# Altium PCB PCB2.PcbDoc
Units mil, origin at the board's own origin, x right, y up, seen from the top; angles counter-clockwise.
Board outline 3188.98 x 2086.8 mil, 2 copper layers (Top Layer, Bottom Layer); 67 components, 40 nets, 224 pads, 205 vias.
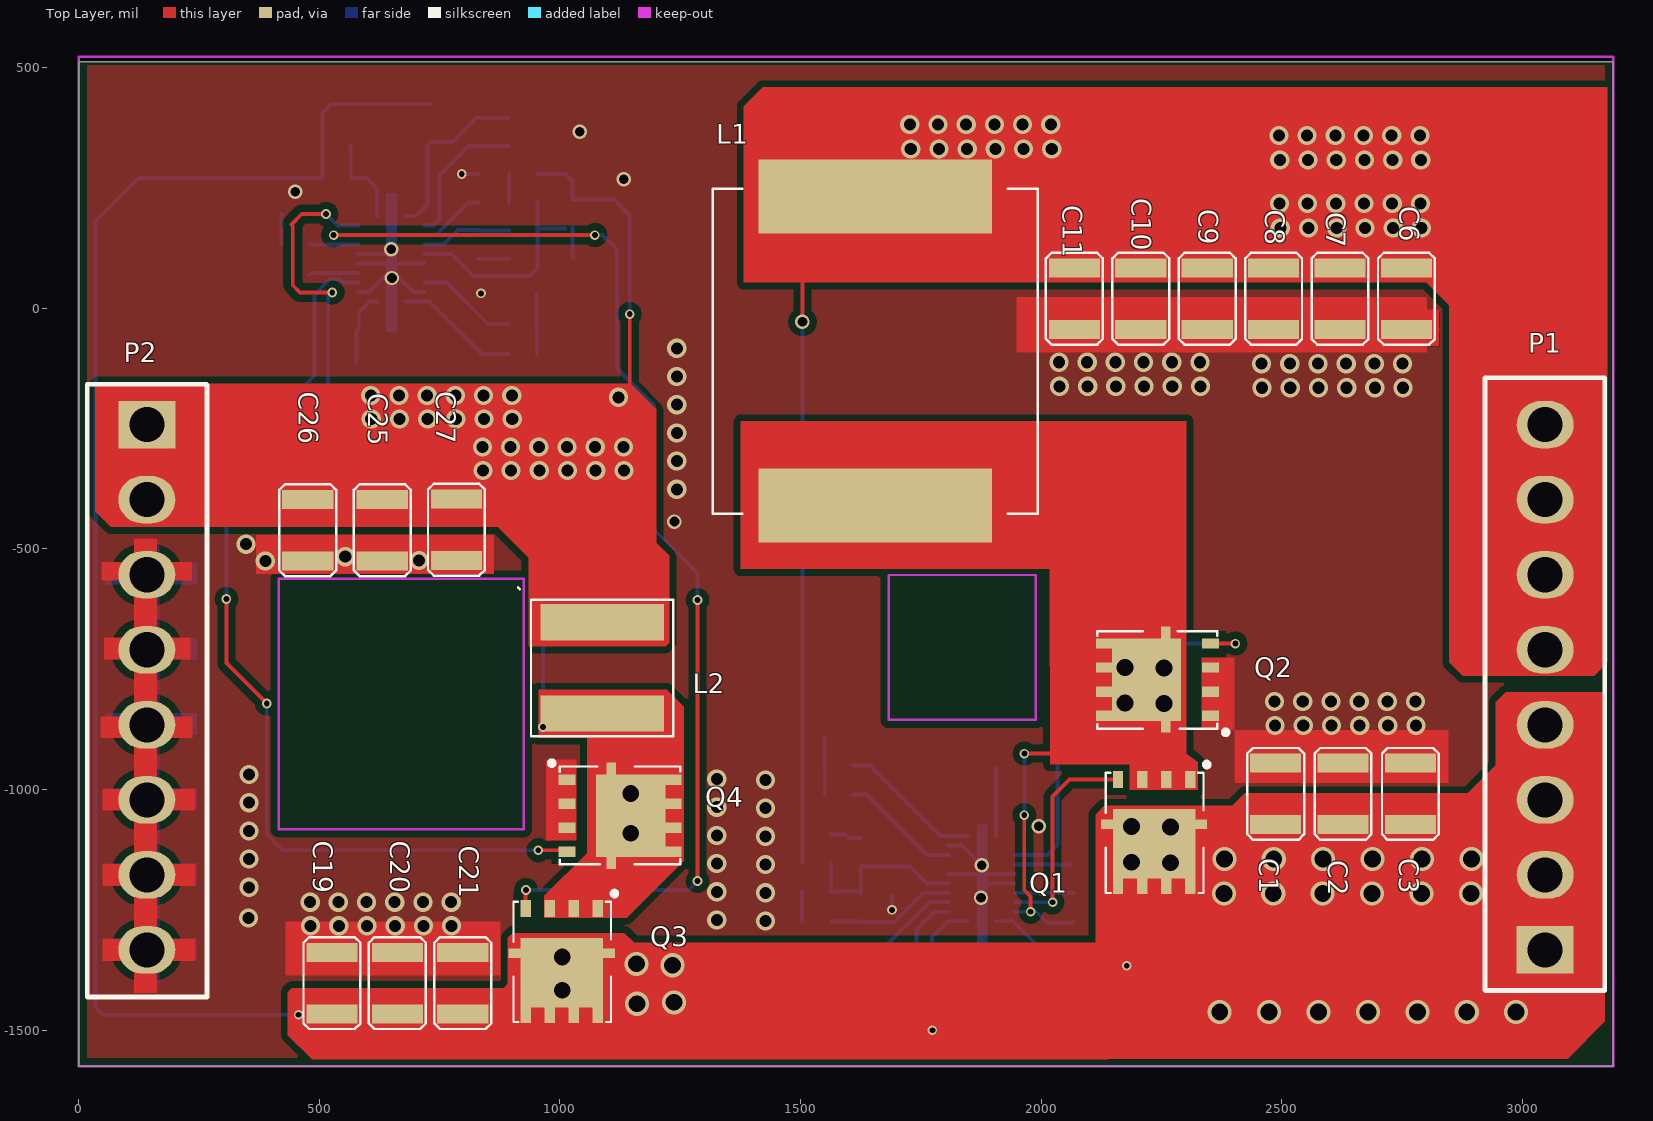
[diagram p0: Top Layer view]
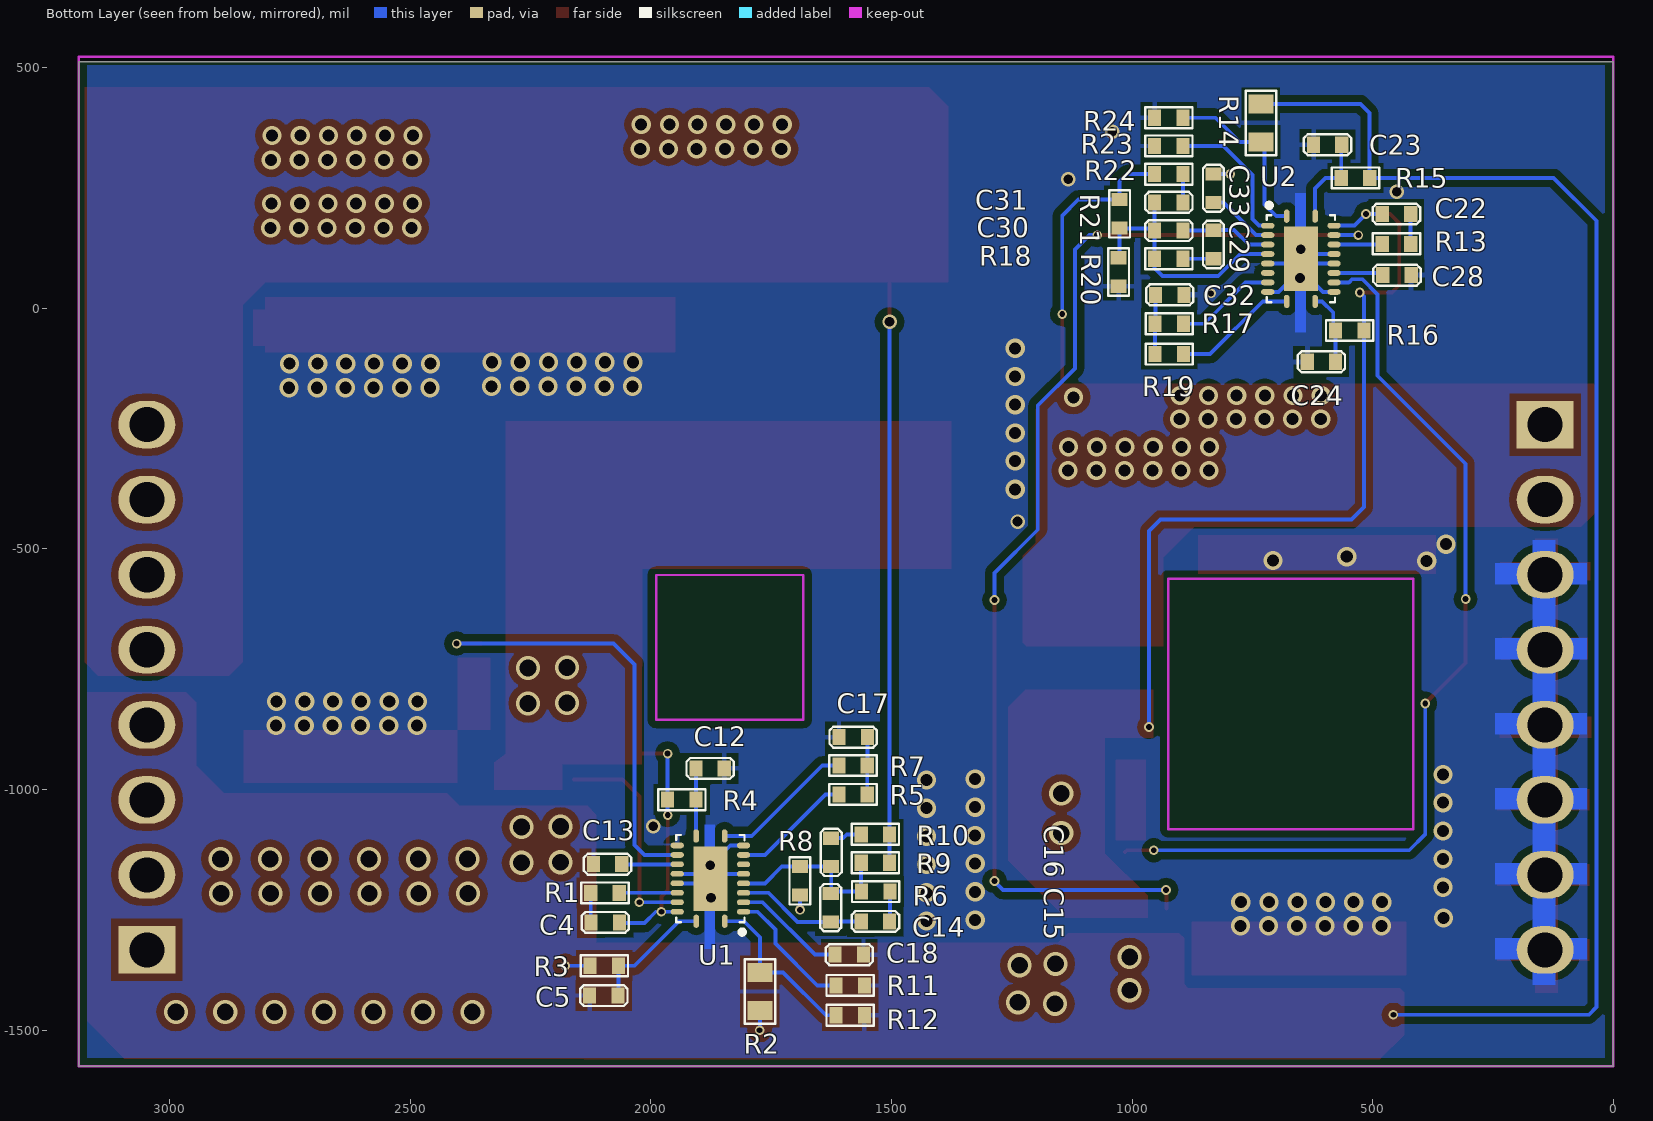
[diagram p1: Bottom Layer view, seen from below]

## Layer stack, top to bottom
Top Layer: signal copper 1.4
Dielectric: dielectric 12.6, FR-4, Dk 4.8
Bottom Layer: signal copper 1.4

## Board outline
0,-1574.8 0,512 3188.98,512 3188.98,-1574.8

## Design rules (kind name [scope] priority, off if disabled: settings)
Clearance Clearance_1 [InPolygon] p1: gap=15
Clearance [All] p2: gap=5
PolygonConnect [IsVia] p1: connectstyle=Direct reliefconductorwidth=10 reliefentries=4 polygonreliefangle="90 Angle"
RoutingVias [All] p1: holewidth=28 width=50 viastyle="Through Hole" minholewidth=28 minwidth=50 maxholewidth=28 maxwidth=50
SilkscreenOverComponentPads [All] p1: minsilkscreentomaskgap=1
SolderMaskExpansion [All] p1: expansion=4
Width [All] p1: maxlimit=200 minlimit=5 preferedwidth=10
27 further rules are at their usual default settings.

## Classes and differential pairs
component class airmachine: C1 C2 C3 C4 C5 C6 C7 C8 C9 C10 C11 C12 C13 C14 C15 C16 C17 C18 L1 Q1 Q2 R1 R2 R3 R4 R5 R6 R7 R8 R9 R10 R11 R12 U1
component class usb: C19 C20 C21 C22 C23 C24 C25 C26 C27 C28 C29 C30 C31 C32 C33 L2 P1 P2 Q3 Q4 R13 R14 R15 R16 R17 R18 R19 R20 R21 R22 R23 R24 U2

## Components (designator, comment, footprint, x,y, rotation, side; value= is the part's Value field where it differs from the comment)
C1 "GRM32ER72A225KA35L" 1210C 2487.26,-1072.94 r90 top
C2 "GRM32ER72A225KA35L" 1210C 2627.26,-1072.94 r90 top
C3 "GRM32ER72A225KA35L" 1210C 2767.26,-1072.94 r90 top
C4 "0.1uF/25V" 0603C 2124.26,-1275.94 r180 bottom
C5 "C1608X7S2A104K080AB" 0603C 2127.26,-1427.94 r180 bottom
C6 "GRM32ER71A476KE15L" 1210C 2759,84 r270 top
C7 "GRM32ER71A476KE15L" 1210C 2621,84 r270 top
C8 "GRM32ER71A476KE15L" 1210C 2483,84 r270 top
C9 "GRM32ER71A476KE15L" 1210C 2345,84 r270 top
C10 "GRM32ER71A476KE15L" 1210C 2207,84 r270 top
C11 "GRM32ER71A476KE15L" 1210C 2069,84 r270 top
C12 "6.8pF/100V" 0603C 1847.26,-955.94 r0 bottom
C13 "EMK107BB7225MA-T" 0603C 2060.26,-1154.94 r0 bottom
C14 "18nF/16V" 0603C 1563,-1274 r180 bottom
C15 "1pF/16V" 0603C 1626.26,-1274.94 r90 bottom
C16 "470pF/16V" 0603C 1625.26,-1159.94 r90 bottom
C17 "2.2uF/16V" 0603C 1550,-891 r0 bottom
C18 "18nF/16V" 0603C 1617.26,-1342.94 r180 bottom
C19 "GRM32ER72A225KA35L" 1210C 526.26,-1466 r90 top
C20 "GRM32ER72A225KA35L" 1210C 662.26,-1466 r90 top
C21 "GRM32ER72A225KA35L" 1210C 798.26,-1466 r90 top
C22 "0.1uF/25V" 0603C 421.26,196 r0 bottom
C23 "C1608X7S2A104K080AB" 0603C 623.26,340 r180 bottom
C24 "10pF/100V" 0603C 636.26,-111 r180 bottom
C25 "GRM32ER71A476KE15L" 1210C 631,-397 r270 top
C26 "GRM32ER71A476KE15L" 1210C 476,-397 r270 top
C27 "GRM32ER71A476KE15L" 1210C 785,-396 r270 top
C28 "EMK107BB7225MA-T" 0603C 479.26,69 r180 bottom
C29 "10nF/16V" 0603C 831,162 r270 bottom
C30 "1pF/16V" 0603C 894.2,161.6 r0 bottom
C31 "220pF/16V" 0603C 953.26,220.2 r180 bottom
C32 "2.2uF/16V" 0603C 951.31,28 r180 bottom
C33 "18nF/16V" 0603C 831,220 r90 bottom
L1 "IHLP6767GZER4R7M" IHLP-6767GZ 1655,-89 r90 top
L2 "XAL7030-272MEB" XAL7030 1088,-842 r90 top
P1 "Header 8" CH3.96-8P 3047.24,-1333.07 r90 top locked
P2 "Header 8" CH3.96-8P 141.73,-241.73 r270 top locked
Q1 "BSC117N08NS5ATMA1" "PowerPAK SO-8" 2336.26,-941.94 r270 top
Q2 "BSC037N08NS5ATMA1" "PowerPAK SO-8" 2389.26,-872.94 r180 top
Q3 "BSC117N08NS5ATMA1" "PowerPAK SO-8" 1105.26,-1210 r270 top
Q4 "BSC037N08NS5ATMA1" "PowerPAK SO-8" 977,-953 r0 top
R1 "0" 0603R 2124.88,-1214.72 r180 bottom
R2 "121K" 0805R 1773.26,-1379.94 r270 bottom
R3 "2.2" 0603R 2126.26,-1365.94 r180 bottom
R4 "1.65K" 0603R 1965.26,-1020.94 r180 bottom
R5 "20K" 0603R 1609.26,-1009.94 r180 bottom
R6 "2.37K" 0603R 1562.26,-1211.94 r180 bottom
R7 "20K" 0603R 1609.26,-949.94 r180 bottom
R8 "1.27K" 0603R 1690.26,-1159.94 r270 bottom
R9 "18K" 0603R 1504,-1152 r0 bottom
R10 "19.1" 0603R 1504,-1093 r0 bottom
R11 "28.7K" 0603R 1556.26,-1406.94 r0 bottom
R12 "8.06K" 0603R 1556.26,-1468.94 r0 bottom
R13 "0" 0603R 421.26,134 r0 bottom
R14 "121K" 0805R 732.26,346 r90 bottom
R15 "2.2" 0603R 506.26,271 r0 bottom
R16 "845" 0603R 518.26,-46 r0 bottom
R17 "20K" 0603R 893.31,-32 r0 bottom
R18 "2.15K" 0603R 953.26,103 r180 bottom
R19 "20K" 0603R 893.31,-95 r0 bottom
R20 "3.4k" 0603R 1028,105 r270 bottom
R21 "18K" 0603R 1026,226 r270 bottom
R22 "39.2" 0603R 953.26,278.8 r180 bottom
R23 "18.2K" 0603R 953.26,337.4 r180 bottom
R24 "8.06K" 0603R 953.26,396 r180 bottom
U1 "LM5145" QFN050P600-8N 1876.26,-1184.94 r0 bottom
U2 "LM5145" QFN050P600-8N 649.26,103 r180 bottom

## Footprints (in the part's own frame and the unit in brackets; to place one, negate y for a bottom-side part, rotate by r counter-clockwise, add the part's x,y. Pads: shape width x height; smd on the part's side, far side on the other; paste and mask are expansions set on the pad)
0603C [mm]
  rect 0.7x0.85 smd: 1(0,0) 2(1.5,0)
  silkscreen extent -0.5,-0.55 2,0.55
0603R [mm]
  rect 0.7x0.85 smd: 1(0,0) 2(1.5,0)
  silkscreen extent -0.5,-0.55 2,0.55
0805R [mm]
  rect 1x1.3 smd: 1(0,0) 2(2,0)
  silkscreen extent -0.7,-0.8 2.7,0.8
1210C [mm]
  rect 1x2.7 smd: 1(0,0) 2(3.25,0)
  silkscreen extent -0.8,-1.5 4.05,1.5
CH3.96-8P [mm]
  rect 2.5x3 hole 1.85: 1(0,0)
  oval 2.5x3 hole 1.85: 2(3.96,0) 3(7.92,0) 4(11.88,0) 5(15.84,0) 6(19.8,0) 7(23.76,0) 8(27.72,0)
  silkscreen extent -2.14,-3.15 30.2,3.18
IHLP-6767GZ [mm]
  rect 3.9x12.32 smd: 1(-8.155,0) 2(8.155,0)
  silkscreen extent -8.57,-8.57 8.57,8.57
"PowerPAK SO-8" [mm]
  rect 0.9x0.54 smd: 1(0.95,-0.67) 2(0.95,-1.94) 3(0.95,-3.21) 4(0.95,-4.48) 5(6.548,-4.48) 6(6.548,-3.21) 7(6.548,-1.94) 8(6.548,-0.67)
  rect 0.5x1.6 smd: 5(3.3,-4.575) 8(3.3,-0.575)
  rect 3.66x2.5 smd: 5(4.325,-3.495)
  rect 3.66x2 smd: 8(4.325,-1.401)
  silkscreen extent 0.03,-5.12 6.93,0.33
QFN050P600-8N [mm]
  oval 0.3x0.7 smd: 1(-0.75,2.25) 10(-0.75,-2.25) 11(0.75,-2.25) 20(0.75,2.25)
  oval 0.7x0.3 smd: 2(-1.75,1.75) 3(-1.75,1.25) 4(-1.75,0.75) 5(-1.75,0.25) 6(-1.75,-0.25) 7(-1.75,-0.75) 8(-1.75,-1.25) 9(-1.75,-1.75) 12(1.75,-1.75) 13(1.75,-1.25) 14(1.75,-0.75) 15(1.75,-0.25) 16(1.75,0.25) 17(1.75,0.75) 18(1.75,1.25) 19(1.75,1.75)
  rect 1.8x3.4 smd: 21(0,0)
  silkscreen extent -1.8,-2.3 1.8,2.94, body extent -1.8,-2.3 1.8,2.3, height 0.8
XAL7030 [mm]
  rect 1.92x6.5 smd: 1(0,0) 2(4.82,0)
  silkscreen extent -1.19,-3.74 6.01,3.76

## Part data
C1 C2 C3 C4 C5 C6 C7 C8 C9 C10 C11 C12 C13 C14 C15 C16 C17 C18 C19 C20 C21 C22 C23 C24 C25 C26 C27 C28 C29 C30 C31 C32 C33: library part 0.01UF, "CCX85-103"
L1 L2: library part INDUCTOR
P1 P2: "Header, 8-Pin"
Q1 Q2 Q3 Q4: library part Si4004DY, "Si4004DY"
R1 R4 R6 R8 R9 R10 R13 R16 R18 R20 R21 R22: library part Res3, "Resistor"
R2 R3 R5 R7 R11 R12 R14 R15 R17 R19 R23 R24: library part "Res Semi", "Semiconductor Resistor"

## Via types
v1: diameter 40, hole 25, Top Layer to Bottom Layer, tented both sides, 137 vias
v2: diameter 50, hole 35, Top Layer to Bottom Layer, tented both sides, 35 vias
v3: diameter 20, hole 12, Top Layer to Bottom Layer, tented both sides, 23 vias
v4: diameter 30, hole 20, Top Layer to Bottom Layer, tented both sides, 10 vias

## Nets (pads, with @x,y where several pads share a name; then routed paths per layer and width w, separated by ;. In a path a pad name is that pad's centre, name@x,y a point inside that pad or via, vN(x,y) a via of type N, cw(c..) or ccw(c..) an arc to the next point about the centre after c; other vN are vias at no path point)
+5V: C25.1 C26.1 C27.1 L2.2 P2.1 P2.2 R21.1 R22.1 | length 637.1
  Top Layer w8: v1(1122,-185) 1145,-162 v3(1145,-12)
  Bottom Layer w8: R22.1 1011.2,278.8 1026,264 R21.1 1112,226 1145,193 v3(1145,-12)
  other v1: 840,-337 898.6,-337 957.2,-337 1015.8,-337 1074.4,-337 1133,-337 839,-288 897.6,-288 956.2,-288 1014.8,-288 1073.4,-288 1132,-288 608,-230 666.6,-230 725.2,-230 783.8,-230 842.4,-230 901,-230 607,-181 665.6,-181 724.2,-181 782.8,-181 841.4,-181 900,-181
AGND1: C1.2 C2.2 C3.2 C5.1 C6.2 C7.2 C8.2 C9.2 C10.2 C11.2 C12.1 C13.2 C17.2 C18.2 C19.2 C20.2 C21.2 C23.1 C24.1 C25.2 C26.2 C27.2 C28.2 C32.2 C33.2 P2.3 P2.4 P2.5 P2.6 P2.7 P2.8 Q2.1 Q2.2 Q2.3 Q4.1 Q4.2 Q4.3 R8.2 R11.1 R12.1 R20.2 R23.1 R24.1 U1.6 U1.9 U1.12 U1.15 U1.16 U1.21 U2.6 U2.9 U2.12 U2.15 U2.16 U2.21 | length 816.3
  Bottom Layer w8: U2.12 602.9,34.1 603,34 U2.21@649.26,80.26 ; U2.15 639.42,93.16 U2.21 ; U2.16 639.42,112.84 U2.21 ; U2.9 696.1,34.1 696,34 649.26,80.74 U2.21 ; U2.6 659.1,93.16 U2.21 ; v3@796,279 v3(796.06,279.06) C33.2 ; v3(1690,-1250) 1690.26,-1249.74 R8.2 ; U1.6 1866.42,-1175.09 U1.21 ; U1.9 1835.04,-1116.04 v4(1876.26,-1157.26) U1.21 ; U1.16 1886.1,-1194.78 U1.21 ; U1.15 1886.1,-1175.09 U1.21
  other v1: 482,-1283 540.6,-1283 599.2,-1283 657.8,-1283 716.4,-1283 775,-1283 1427,-1273 1326,-1271 353,-1267 481,-1234 539.6,-1234 598.2,-1234 656.8,-1234 715.4,-1234 774,-1234 1427,-1214.4 1326,-1212.4 354,-1203 1427,-1155.8 1326,-1153.8 354,-1144.4 1427,-1097.2 1326,-1095.2 354,-1085.8 1427,-1038.6 1326,-1036.6 354,-1027.2 1427,-980 1326,-978 354,-968.6 2486,-867 2544.6,-867 2603.2,-867 2661.8,-867 2720.4,-867 2779,-867 2485,-817 2543.6,-817 2602.2,-817 2660.8,-817 2719.4,-817 2778,-817 388,-525 707,-524 554,-516 348,-490 1243,-376 1243,-317.4 1243,-258.8 1243,-200.2 2459,-165 2517.6,-165 2576.2,-165 2634.8,-165 2693.4,-165 2752,-165 2038,-162 2096.6,-162 2155.2,-162 2213.8,-162 2272.4,-162 2331,-162 1243,-141.6 2458,-115 2516.6,-115 2575.2,-115 2633.8,-115 2692.4,-115 2751,-115 2037,-112 2095.6,-112 2154.2,-112 2212.8,-112 2271.4,-112 2330,-112 1243,-83
  other v3: 836,31
  other v4: 1875,-1225 1995,-1076 1238.03,-443 651,63 649.26,122.69 450,242 1133,268 1041,367
NetC4_1: C4.1 R1.1 | length 61.5
  Bottom Layer w8: C4.1 2124.88,-1275.32 R1.1
NetC4_2: C4.2 L1.1 Q1.1 Q1.2 Q1.3 Q2.5 Q2.6 Q2.7 Q2.8 R4.1 U1.19 | length 556.8
  Top Layer w8: v3(1965,-1053) 1965,-1209 1978,-1222 v3(1978,-1253.83) ; v3(1965.26,-925.26) 2067.26,-925.26 2069,-927
  Bottom Layer w8: U1.19 v3(1978,-1253.83) ; v3(1965,-1053) 1965.26,-1052.74 R4.1 v3(1965.26,-925.26) ; 1989.83,-1253.83 2013,-1277 2064.14,-1277 C4.2
  other v2: 2255,-821 2174,-820 2255,-747 2174,-746
NetC5_2: C5.2 R3.2 U1.20 | length 262.1
  Bottom Layer w8: U1.20 1941.52,-1273.52 2033.94,-1365.94 R3.2 2067.2,-1426.94 C5.2
NetC12_2: C12.2 R4.2 U1.11 | length 140.6
  Bottom Layer w8: U1.11 1906.2,-1095.94 R4.2 1906.31,-1020.83 C12.2
NetC14_1: C14.1 C15.1 U1.4 | length 269.8
  Bottom Layer w8: C14.1 1625.32,-1274 C15.1 1695.06,-1274.94 1755.54,-1214.46 U1.4
NetC14_2: C14.2 R6.2 | length 62.4
  Bottom Layer w8: R6.2 1503.2,-1273.26 C14.2
NetC15_2: C15.2 C16.1 R6.1 R8.1 R9.2 U1.5 | length 377.4
  Bottom Layer w8: R9.2 1563.06,-1211.14 R6.1 1622.31,-1211.94 C15.2@1625.26,-1214.88 ; C15.2 C15.2@1625.26,-1214.88 ; U1.5 1762.78,-1194.78 1727.94,-1159.94 R8.1 C16.1 C15.2@1625.26,-1214.88
NetC16_2: C16.2 R10.2 | length 65.5
  Bottom Layer w8: R10.2 1593,-1093 1600.88,-1100.88 C16.2
NetC17_1: C17.1 R5.2 R7.2 | length 119
  Bottom Layer w8: C17.1 1550,-949.73 R7.2 R5.2
NetC18_1: C18.1 U1.3 | length 235.2
  Bottom Layer w8: C18.1 1659.06,-1342.94 1767.85,-1234.15 U1.3
NetC22_1: C22.1 R13.1 | length 62
  Bottom Layer w8: R13.1 C22.1
NetC22_2: C22.2 L2.1 Q3.1 Q3.2 Q3.3 Q4.5 Q4.6 Q4.7 Q4.8 R16.1 U2.19 | length 1770.4
  Top Layer w8: v3(514,196) 463.65,196 442,174.35 445,171.35 445,48 460,33 v3(527,33) ; L2.1@1060,-870 L2.1
  Bottom Layer w8: C22.2 v3(514,196) 538.1,171.9 U2.19 ; v3(527,33) 518.26,24.26 R16.1 518.26,-412.94 544.31,-439 941,-439 965,-463 v3(965,-870)
  other v2: 1147.28,-1090.59 1147.28,-1008.17
NetC23_2: C23.2 R15.2 U2.20 | length 190.6
  Bottom Layer w8: C23.2 565.31,338.89 R15.2 598,271 619.73,249.27 U2.20
NetC24_2: C24.2 R16.2 U2.11 | length 151.4
  Bottom Layer w8: C24.2 577.2,-46.11 R16.2 582,-41.31 582,-9 605.42,14.42 U2.11
NetC29_1: C29.1 C30.1 U2.4 | length 189.2
  Bottom Layer w8: U2.4 757.53,132.53 788,163 830,163 C29.1 893.8,162 C30.1
NetC29_2: C29.2 R18.2 | length 63.2
  Bottom Layer w8: C29.2 894.15,102.94 R18.2
NetC30_2: C30.2 C31.1 R18.1 R20.1 R21.2 U2.5 | length 520.4
  Bottom Layer w8: U2.5 775.16,112.84 821,67 937,67 953.26,83.26 R18.1 C30.2 ; C31.1 C30.2 ; R21.2@1011.26,166.06 957.71,166.06 C30.2 ; R21.2 1026,107 R20.1
NetC31_2: C31.2 R22.2 | length 58.6
  Bottom Layer w8: C31.2 R22.2
NetC32_1: C32.1 R17.2 R19.2 | length 123.4
  Bottom Layer w8: C32.1 951.31,-30.94 R17.2 R19.2
NetC33_1: C33.1 U2.3 | length 140.9
  Bottom Layer w8: U2.3 742.6,152.21 810.38,220 C33.1
NetQ1_4: Q1.4 U1.18 | length 449.4
  Top Layer w8: v3(2023.85,-1234.15) 2023.85,-1014.15 2058.66,-979.34 Q1.4
  Bottom Layer w8: U1.18 v3(2023.85,-1234.15) v3@2024,-1234
NetQ2_4: Q2.4 U1.13 | length 911.7
  Top Layer w8: Q2.4 v3(2403.56,-696.56)
  Bottom Layer w8: U1.13 2013.28,-1135.72 2034,-1115 2034,-740 2077.44,-696.56 v3(2403.56,-696.56)
NetQ3_4: Q3.4 U2.18 | length 2437.6
  Top Layer w8: v3(529.79,152.21) v3(1072.79,152.21) ; Q3.4 928.88,-1221.12 929,-1221 v3@929,-1208.5 ; v3(1286,-1190) v3(1286,-606)
  Bottom Layer w8: v3(529.79,152.21) U2.18 ; v3(929.5,-1208.5) 1268.5,-1208.5 v3@1287,-1190 ; v3(1072.79,152.21) 1088.79,152.21 1119,122 1119,-125 1196,-202 1196,-460 1286,-550 v3(1286,-606)
NetQ4_4: Q4.4 U2.13 | length 1977.2
  Top Layer w8: v3(307,-604) 307,-737 v3(391,-821) ; v3(955,-1126) 1011.02,-1126 Q4.4
  Bottom Layer w8: v3(307,-604) 307,-323 490,-140 490,29 521.47,60.47 543,60.47 549.69,53.79 U2.13 ; v3(391,-821) 391,-1093 424,-1126 v3(955,-1126)
NetR1_2: R1.2 U1.17 | length 120.8
  Bottom Layer w8: U1.17 2065.57,-1214.46 R1.2
NetR2_1: R2.1 R12.2 U1.1 | length 355.2
  Bottom Layer w8: R12.2 1636.06,-1468.94 1725.06,-1379.94 R2.1 1773.26,-1306.74 1806.48,-1273.52 U1.1
NetR5_1: R5.1 U1.8 | length 250.2
  Bottom Layer w8: R5.1 1636.94,-1009.94 1762.72,-1135.72 U1.8
NetR7_1: R7.1 U1.10 | length 298.1
  Bottom Layer w8: R7.1 1643.94,-949.94 1790.35,-1096.35 U1.10
NetR11_2: R11.2 U1.2 | length 272.6
  Bottom Layer w8: R11.2 1654.26,-1406.94 1739.1,-1322.1 1741,-1320.2 1741,-1291 1778.17,-1253.83 U1.2
NetR13_2: R13.2 U2.17 | length 100.7
  Bottom Layer w8: R13.2 481.79,132.53 U2.17
NetR14_1: R14.1 R24.2 U2.1 | length 372
  Bottom Layer w8: U2.1 700.58,191.58 725,216 725,338.74 R14.1 777,346 827,396 R24.2
NetR17_1: R17.1 U2.8 | length 210.7
  Bottom Layer w8: U2.8 764.21,53.79 850,-32 R17.1
NetR19_1: R19.1 U2.10 | length 259.8
  Bottom Layer w8: U2.10 728.58,14.42 838,-95 R19.1
NetR23_2: R23.2 U2.2 | length 298
  Bottom Layer w8: U2.2 736,171.9 750,185.9 750,277 810.4,337.4 R23.2
VCC_12_24: C6.1 C7.1 C8.1 C9.1 C10.1 C11.1 L1.2 P1.5 P1.6 P1.7 P1.8 R9.1 R10.1 | length 1443.5
  Top Layer w8: v4(1504,-28) 1504,103 1597.06,196.06 L1.2@1654,196.06
  Bottom Layer w8: R9.1 R10.1 v4(1504,-28)
  other v1: 2497,167 2555.6,167 2614.2,167 2672.8,167 2731.4,167 2790,167 2495,218 2553.6,218 2612.2,218 2670.8,218 2729.4,218 2788,218 2496,308 2554.6,308 2613.2,308 2671.8,308 2730.4,308 2789,308 1729,331 1787.6,331 1846.2,331 1904.8,331 1963.4,331 2022,331 2494,359 2552.6,359 2611.2,359 2669.8,359 2728.4,359 2787,359 1727,382 1785.6,382 1844.2,382 1902.8,382 1961.4,382 2020,382
VCC_L1: C28.1 U2.14 | length 103
  Bottom Layer w8: C28.1 483.73,73.47 U2.14
VCC_L2: C13.1 U1.14 | length 115.3
  Bottom Layer w8: U1.14 2059.79,-1155.41 C13.1
VIN: C1.1 C2.1 C3.1 C19.1 C20.1 C21.1 P1.1 P1.2 P1.3 P1.4 Q1.5 Q1.6 Q1.7 Q1.8 Q3.5 Q3.6 Q3.7 Q3.8 R2.2 R3.1 R14.2 R15.1 | length 3069.3
  Bottom Layer w8: 375,271 412,271 ; v3(457,-1468) 51,-1468 35,-1452 35,-219 35,182 124,271 412,271 ; R14.2 525.74,424.74 507,406 507,271.74 R15.1 412,271 ; v3@1773,-1500 1773.26,-1499.74 R2.2 ; R3.1 v3(2177.94,-1365.94) v3@2178,-1366
  other v2: 2371,-1462 2473.67,-1462 2576.33,-1462 2679,-1462 2781.67,-1462 2884.33,-1462 2987,-1462 1160,-1445 1237,-1442 1005,-1417 1234,-1365 1159,-1362 1005,-1348 2379.67,-1216 2482.33,-1216 2585,-1216 2687.67,-1216 2790.33,-1216 2893,-1216 2269,-1152 2188,-1151 2380.67,-1144 2483.33,-1144 2586,-1144 2688.67,-1144 2791.33,-1144 2894,-1144 2269,-1078 2188,-1077
  other v3: 1774,-1500
pads on no net: U1.7 U2.7

## Polygon pours and split planes (outlines as drawn)
AGND1 on Top Layer "Top Layer-No Net" (solid, remove dead copper, pour order 1000): -82,586 3250,586 3376,460 3242,326 3242,-1570 -157,-1570 -264,-1463 -26,-1225 -26,590
AGND1 on Bottom Layer "Top Layer-No Net" (solid, remove dead copper, pour order 1001): -82,586 3250,586 3376,460 3242,326 3242,-1570 -157,-1570 -264,-1463 -26,-1225 -26,590

## Keep-outs
Keep-Out Layer:
  lines w5: 0,-1574.8 0,523 3188.98,523 3188.98,-1574.8 0,-1574.8 ; 416,-1082 925,-1082 925,-562 416,-562 416,-1082 ; 1683,-855 1683,-554 1989,-554 1989,-855 1683,-855

## Other copper
Top Layer:
  rectangle net AGND1: 369,-552 863,-471
  rectangle net AGND1: 115,-1423 163,-478
  rectangle net AGND1: 48,-566 236,-527
  rectangle net AGND1: 53,-730 232,-684
  rectangle net AGND1: 45,-893 237,-848
  rectangle net AGND1: 50,-1043.91 242,-998.91
  rectangle net AGND1: 50,-1199.81 242,-1154.81
  rectangle net AGND1: 50,-1355.72 242,-1310.72
  rectangle net AGND1: 1949,-92 2802,24
  rectangle net AGND1: 2784,-78.64 2827.15,-2
  rectangle net AGND1: 430,-1386.72 876.71,-1274
  rectangle net AGND1: 2402,-986 2846,-876
  rectangle net AGND1: 2333,-876 2402,-726
  rectangle net AGND1: 971,-1106 1034,-937
  region net VIN: 3171.26,-798 2965,-798 2945,-818 2945,-949.24 2886.24,-1008 2423,-1008 2397,-1034 2131,-1034 2113,-1052 2113,-1559 3094,-1559 3171.26,-1481.74
  region net NetC4_2: 2017.75,-540.95 2018.76,-946.88 2184,-947.44 2184,-1000 2325,-1000 2325,-943 2302,-925 2302,-235 1376,-235 1376,-541.75
  region net VCC_12_24: 1382.5,420 1421.5,459 3176.5,459 3176.5,-735.5 3149,-763 2876,-763 2848.5,-735.5 2848.5,6 2800.5,54 1382.5,54
  region net VIN: 883,-1413 892,-1403 892,-1308 903,-1297 904,-1298 1134,-1298 1154,-1318 2138,-1318 2138,-1560 485,-1560 435,-1510 435,-1421 443,-1413
  region net NetC22_2: 968,-1266 1139,-1266 1257,-1148 1257,-828 1222,-793 956,-793 956,-892 1057,-892 1057,-1132 968,-1221
  region net +5V: 35,-162 40.25,-156.75 1146.75,-156.75 1200,-210 1200,-487 1227,-514 1227,-695 1220,-702 935,-702 935,-518 871,-454 67,-454 35,-422
Bottom Layer:
  rectangle net AGND1: 54.37,-573.85 246.37,-528.85
  rectangle net AGND1: 54.37,-729.76 246.37,-684.76
  rectangle net AGND1: 54.37,-885.66 246.37,-840.66
  rectangle net AGND1: 54.37,-1041.57 246.37,-996.57
  rectangle net AGND1: 54.37,-1197.48 246.37,-1152.48
  rectangle net AGND1: 54.37,-1353.38 246.37,-1308.38
  rectangle net AGND1: 120,-1406 168,-481
  rectangle net AGND1: 1867,-1331 1889,-1072.73
  rectangle net AGND1: 639,-50 662,240

## Silkscreen, mask and mechanical layers (free items; w line width, h text height)
Top Overlay:
  lines w5: 17.72,-1429.64 18.72,-1430.65 ; 912.94,-579.75 916.94,-583.75 ; 3169.26,-156.75 3171.26,-158.75
Top Solder:
  region: 3171.13,-119 3171.13,441 2957,441 2957,-119
Mechanical 1:
  lines w5: 0,-1574.8 3188.98,-1574.8 3188.98,512 0,512 0,-1574.8 ; 411,-1086 411,-557 926,-557 926,-1086 411,-1086 ; 1680,-855 1993,-855 1993,-550 1680,-550 1680,-855